# Allegro board nir_brd.brd
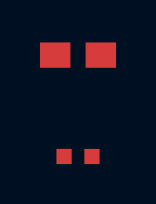
[diagram p0: board, top side]
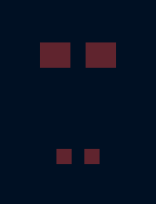
[diagram p1: board, bottom side, seen from below]

No outline. copper layers: TOP, BOTTOM. Coordinates in mm from the lowest, leftmost part position.

## Placement (name value [footprint] x y rotation side)
C1  10uF  [0805]  0 5.08 0 top
C2  0.1uF  [0603]  0 0 0 top

## Library data of the parts
C1 = CAP
C2 = CAPACITOR NON-POL

## Footprints (pads in the part's own frame, mm; a bottom-side part is the same pattern mirrored in y, then rotated)
0603
  rect 0.762x0.762 smd: 1(-0.699,0) 2(0.699,0)
0805
  rect 1.524x1.27 smd: 1(-1.143,0) 2(1.143,0)

## Nets
GND: C1.2 C2.2
VREF4V_950: C1.1 C2.1
